# EAGLE board Mini AMplifier print (EAGLE 7.6.0), part 1 of 3
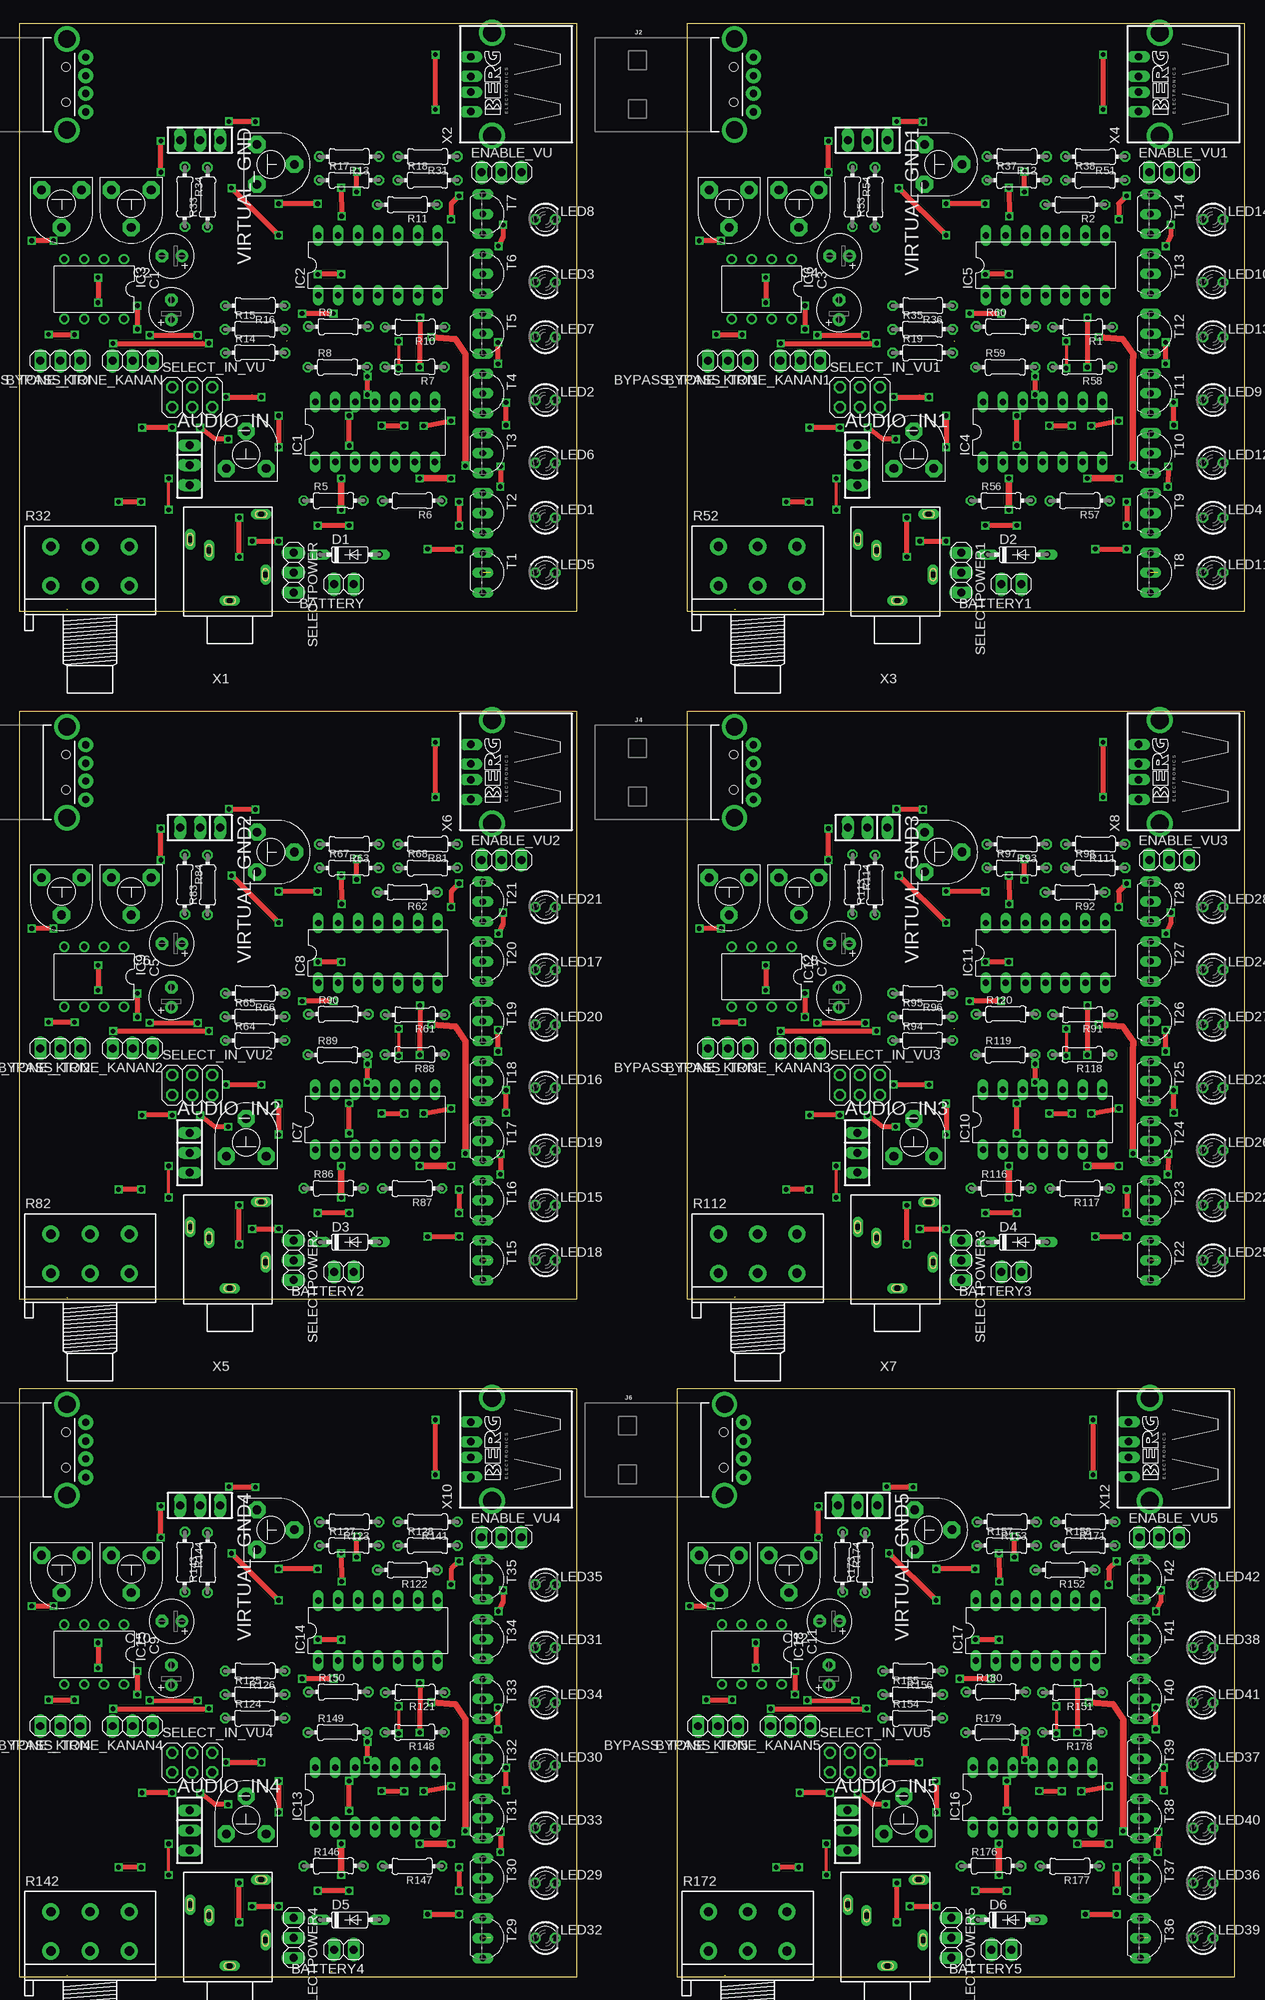
[diagram p0: board, top side]
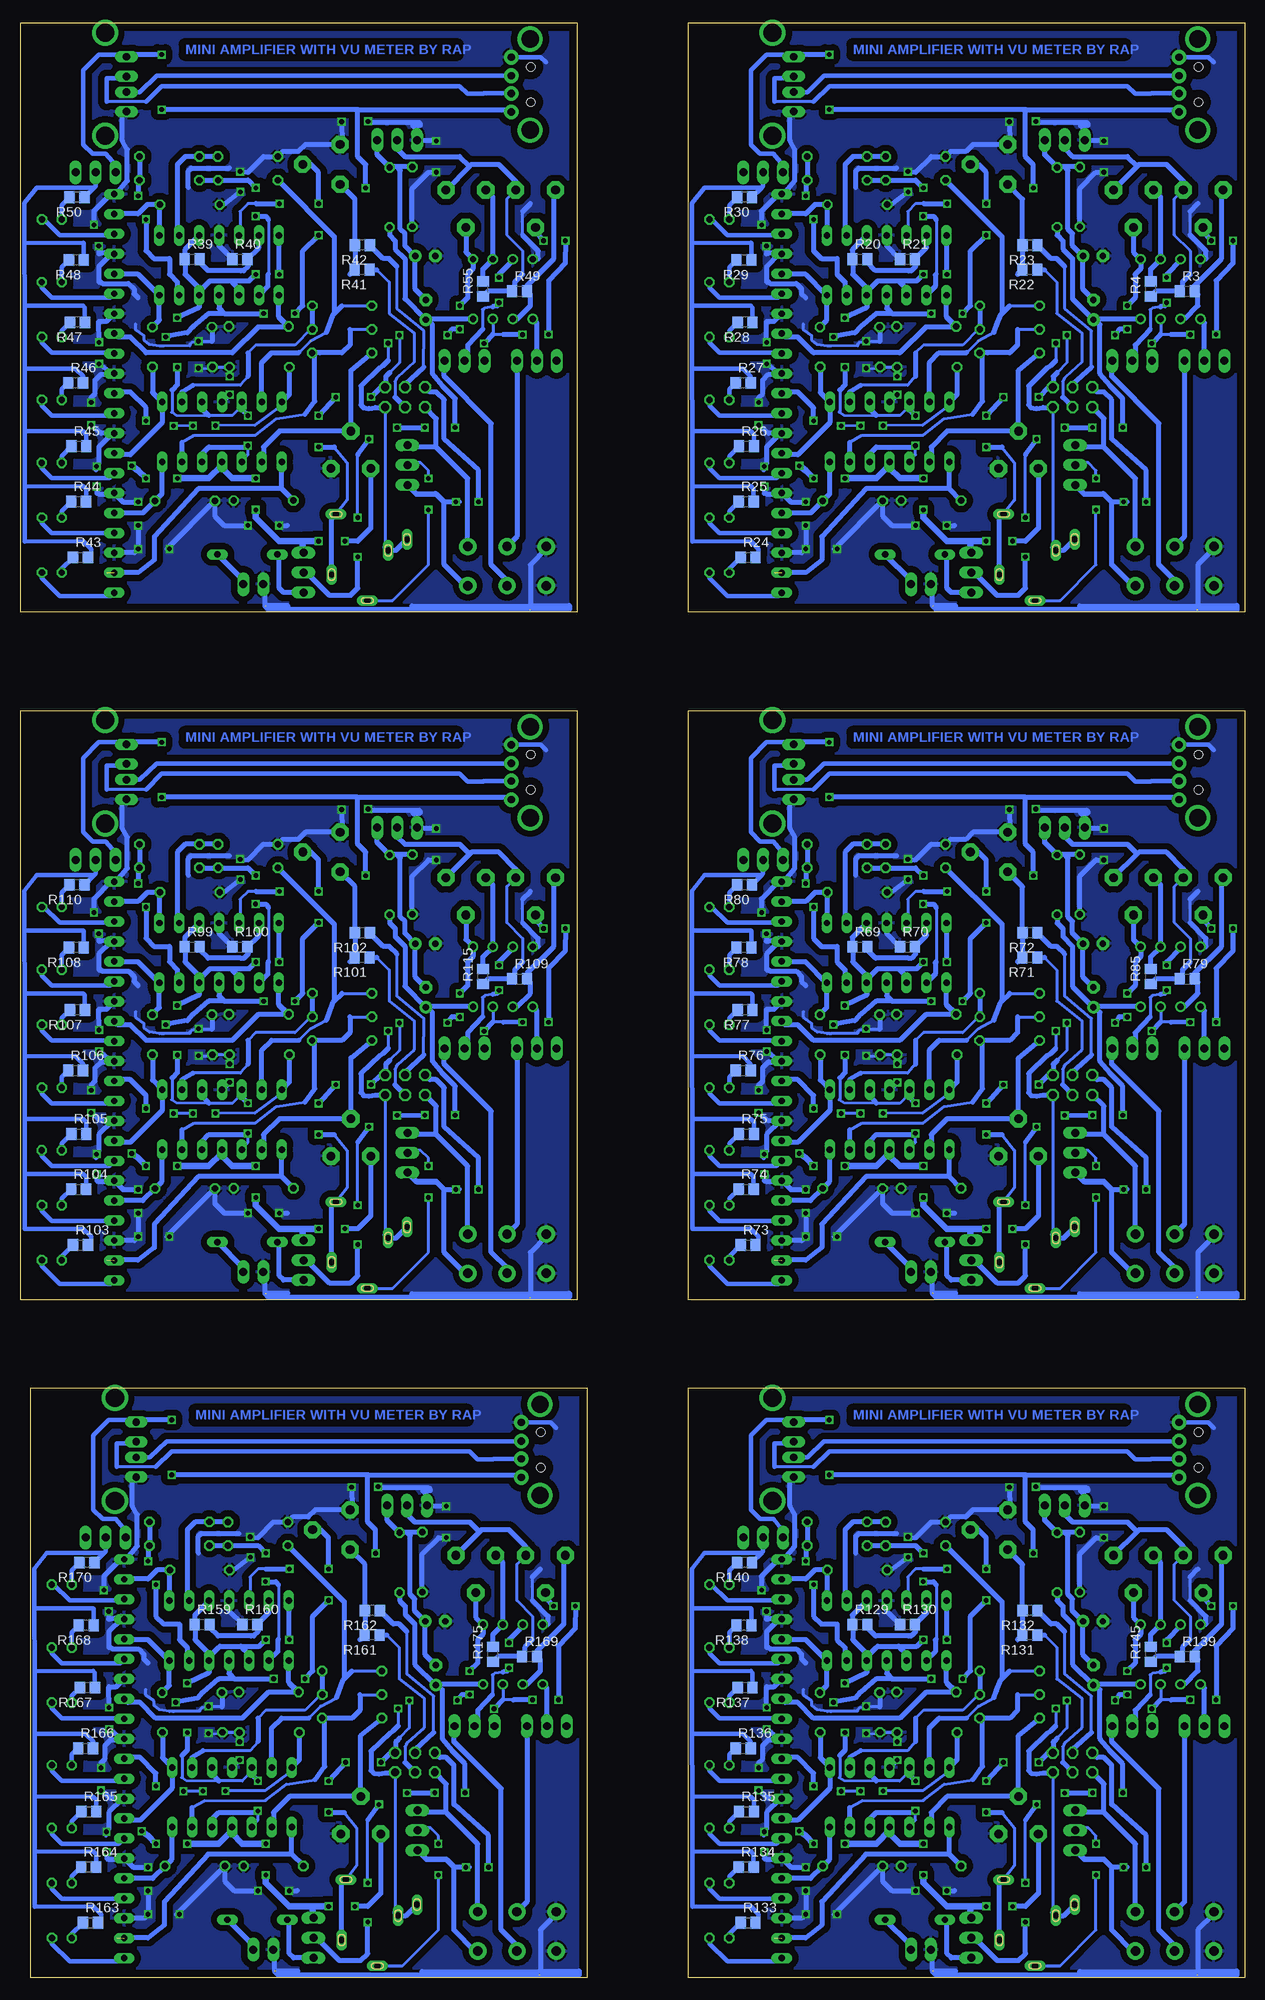
[diagram p1: board, bottom side, seen from below]

Size 156.09 x 248.99 mm. Coordinates in mm from the lower left corner, seen from the top.
Outline: 0,173.99 0,248.99 71,248.99 71,173.99 0,173.99
Outline: 85.09,173.99 85.09,248.99 156.09,248.99 156.09,173.99 85.09,173.99
Outline: 0,86.36 0,161.36 71,161.36 71,86.36 0,86.36
Outline: 85.09,86.36 85.09,161.36 156.09,161.36 156.09,86.36 85.09,86.36
Outline: 0,0 0,75 71,75 71,0 0,0
Outline: 83.82,0 83.82,75 154.82,75 154.82,0 83.82,0
Copper layers (1*16): Top 0.035mm / dielectric 1.5mm / Bottom 0.035mm
Design rules "default": minimum track width 10mil, minimum drill 24mil, track to track 8mil, track to pad 8mil, pad to pad 8mil, via to via 8mil, smd to smd 8mil, copper to edge 40mil, drill to drill 8mil, minimum pad ring 10mil, minimum via ring 8mil, stop-mask expansion 4mil, vias tented up to drill 0mil, thermal gap 10mil

## Footprints (pad centres in the part's own frame; a part is rotated, then mirrored left to right if it is on the bottom)
SIP-100-3V = drill 1.016 long: 1 -2.54,0; 2 0,0; 3 2.54,0
1X02 = drill 1.016 long: 1 -1.27,0; 2 1.27,0
1X03 = drill 1.016 long: 1 -2.54,0; 2 0,0; 3 2.54,0
E2,5-6 = drill 0.813 pad 1.6: + -1.27,0 | drill 0.813 pad 1.6 octagon: - 1.27,0
DO35-7 = drill 0.813 long: A 3.81,0; C -3.81,0
DIL14 = drill 0.813 long: 1 -7.62,-3.81; 2 -5.08,-3.81; 3 -2.54,-3.81; 4 0,-3.81; 5 2.54,-3.81; 6 5.08,-3.81; 7 7.62,-3.81; 8 7.62,3.81; 9 5.08,3.81; 10 2.54,3.81; 11 0,3.81; 12 -2.54,3.81; 13 -5.08,3.81; 14 -7.62,3.81
DIL08 = drill 0.813 pad 1.27: 1 -3.81,-3.81; 2 -1.27,-3.81; 3 1.27,-3.81; 4 3.81,-3.81; 5 3.81,3.81; 6 1.27,3.81; 7 -1.27,3.81; 8 -3.81,3.81
USB-A-H = drill 0.914 pad 1.88: D+ 2.4,1.127; D- 2.4,-1.127; GND 2.4,3.5; VBUS 2.4,-3.5 | drill 2.2: SHLD1 0,-5.8; SHLD2 0,5.8 | hole 1.1: -0.1,2.25; -0.1,-2.25
LED3MM = drill 0.813 octagon: A -1.27,0; K 1.27,0
0204/7 = drill 0.813 octagon: 1 -3.81,0; 2 3.81,0
R0805 = smd 1.3 x 1.5: 1 -0.95,0; 2 0.95,0
3RP/1610G = drill 1.2 pad 2.184: 1-1 -5,0; 1-2 0,0; 1-3 5,0; 2-1 -5,5; 2-2 0,5; 2-3 5,5
2X03 = drill 1.016 octagon: 1 -2.54,-1.27; 2 -2.54,1.27; 3 0,-1.27; 4 0,1.27; 5 2.54,-1.27; 6 2.54,1.27
TO92-EBC = drill 0.813 long: B 0,-1.27; C 2.54,-1.27; E -2.54,-1.27
TRIMPOT = drill 1.1 pad 2.184 octagon: 1 -2.538,1.271; 2 0,-3.5; 3 2.536,1.271
1503_09 = drill 0.8 pad 1.2 long: 1 0,-2.1; 2 -4.55,-5.4; 3 5.05,-9.9; 4 -4,-13.1; 5 2.65,-8.5
PN87520-S = drill 0.95 long: 1 -3.5,2.71; 2 -1,2.71; 3 1,2.71; 4 3.5,2.71 | drill 2.3 pad 2.9: S1 -6.57,0; S2 6.57,0

## Placement (x,y rotation side)
AUDIO_IN  [SIP-100-3V]  21.66,192.68 270 top
AUDIO_IN1  [SIP-100-3V]  106.75,192.68 270 top
AUDIO_IN2  [SIP-100-3V]  21.66,105.05 270 top
AUDIO_IN3  [SIP-100-3V]  106.75,105.05 270 top
AUDIO_IN4  [SIP-100-3V]  21.66,18.69 270 top
AUDIO_IN5  [SIP-100-3V]  105.48,18.69 270 top
BATTERY  [1X02]  41.33,177.49 180 top
BATTERY1  [1X02]  126.42,177.49 180 top
BATTERY2  [1X02]  41.33,89.86 180 top
BATTERY3  [1X02]  126.42,89.86 180 top
BATTERY4  [1X02]  41.33,3.5 180 top
BATTERY5  [1X02]  125.15,3.5 180 top
BYPASS_TONE_KANAN  [1X03]  14.4,205.98 180 top
BYPASS_TONE_KANAN1  [1X03]  99.49,205.98 180 top
BYPASS_TONE_KANAN2  [1X03]  14.4,118.35 180 top
BYPASS_TONE_KANAN3  [1X03]  99.49,118.35 180 top
BYPASS_TONE_KANAN4  [1X03]  14.4,31.99 180 top
BYPASS_TONE_KANAN5  [1X03]  98.22,31.99 180 top
BYPASS_TONE_KIRI  [1X03]  5.18,205.98 180 top
BYPASS_TONE_KIRI1  [1X03]  90.27,205.98 180 top
BYPASS_TONE_KIRI2  [1X03]  5.18,118.35 180 top
BYPASS_TONE_KIRI3  [1X03]  90.27,118.35 180 top
BYPASS_TONE_KIRI4  [1X03]  5.18,31.99 180 top
BYPASS_TONE_KIRI5  [1X03]  89,31.99 180 top
C1  [E2,5-6]  19.34,212.48 90 top
C2  [E2,5-6]  19.4,219.33 180 top
C3  [E2,5-6]  104.43,212.48 90 top
C4  [E2,5-6]  104.49,219.33 180 top
C5  [E2,5-6]  19.34,124.85 90 top
C6  [E2,5-6]  19.4,131.7 180 top
C7  [E2,5-6]  104.43,124.85 90 top
C8  [E2,5-6]  104.49,131.7 180 top
C9  [E2,5-6]  19.34,38.49 90 top
C10  [E2,5-6]  19.4,45.34 180 top
C11  [E2,5-6]  103.16,38.49 90 top
C12  [E2,5-6]  103.22,45.34 180 top
D1  1N4148DO35-7  [DO35-7]  42.07,181.3 0 top
D2  1N4148DO35-7  [DO35-7]  127.16,181.3 0 top
D3  1N4148DO35-7  [DO35-7]  42.07,93.67 0 top
D4  1N4148DO35-7  [DO35-7]  127.16,93.67 0 top
D5  1N4148DO35-7  [DO35-7]  42.07,7.31 0 top
D6  1N4148DO35-7  [DO35-7]  125.89,7.31 0 top
ENABLE_VU  [1X03]  61.42,230 0 top
ENABLE_VU1  [1X03]  146.51,230 0 top
ENABLE_VU2  [1X03]  61.42,142.37 0 top
ENABLE_VU3  [1X03]  146.51,142.37 0 top
ENABLE_VU4  [1X03]  61.42,56.01 0 top
ENABLE_VU5  [1X03]  145.24,56.01 0 top
IC1  LM324N  [DIL14]  45.31,196.9 0 top
IC2  LM324N  [DIL14]  45.68,218.14 0 top
IC3  LM358N  [DIL08]  9.5,215.11 180 top
IC4  LM324N  [DIL14]  130.4,196.9 0 top
IC5  LM324N  [DIL14]  130.77,218.14 0 top
IC6  LM358N  [DIL08]  94.59,215.11 180 top
IC7  LM324N  [DIL14]  45.31,109.27 0 top
IC8  LM324N  [DIL14]  45.68,130.51 0 top
IC9  LM358N  [DIL08]  9.5,127.48 180 top
IC10  LM324N  [DIL14]  130.4,109.27 0 top
IC11  LM324N  [DIL14]  130.77,130.51 0 top
IC12  LM358N  [DIL08]  94.59,127.48 180 top
IC13  LM324N  [DIL14]  45.31,22.91 0 top
IC14  LM324N  [DIL14]  45.68,44.15 0 top
IC15  LM358N  [DIL08]  9.5,41.12 180 top
IC16  LM324N  [DIL14]  129.13,22.91 0 top
IC17  LM324N  [DIL14]  129.5,44.15 0 top
IC18  LM358N  [DIL08]  93.32,41.12 180 top
J1  USB_A_PTH_MALE  [USB-A-H]  6.03,241.17 0 top
J2  USB_A_PTH_MALE  [USB-A-H]  91.12,241.17 0 top
J3  USB_A_PTH_MALE  [USB-A-H]  6.03,153.54 0 top
J4  USB_A_PTH_MALE  [USB-A-H]  91.12,153.54 0 top
J5  USB_A_PTH_MALE  [USB-A-H]  6.03,67.18 0 top
J6  USB_A_PTH_MALE  [USB-A-H]  89.85,67.18 0 top
LED1  [LED3MM]  67,185.99 0 top
LED2  [LED3MM]  67,200.99 0 top
LED3  [LED3MM]  67.01,215.98 0 top
LED4  [LED3MM]  152.09,185.99 0 top
LED5  [LED3MM]  67,178.98 0 top
LED6  [LED3MM]  67,192.98 0 top
LED7  [LED3MM]  67,208.99 0 top
LED8  [LED3MM]  67,223.99 0 top
LED9  [LED3MM]  152.09,200.99 0 top
LED10  [LED3MM]  152.1,215.98 0 top
LED11  [LED3MM]  152.09,178.98 0 top
LED12  [LED3MM]  152.09,192.98 0 top
LED13  [LED3MM]  152.09,208.99 0 top
LED14  [LED3MM]  152.09,223.99 0 top
LED15  [LED3MM]  67,98.36 0 top
LED16  [LED3MM]  67,113.36 0 top
LED17  [LED3MM]  67.01,128.35 0 top
LED18  [LED3MM]  67,91.35 0 top
LED19  [LED3MM]  67,105.35 0 top
LED20  [LED3MM]  67,121.36 0 top
LED21  [LED3MM]  67,136.36 0 top
LED22  [LED3MM]  152.09,98.36 0 top
LED23  [LED3MM]  152.09,113.36 0 top
LED24  [LED3MM]  152.1,128.35 0 top
LED25  [LED3MM]  152.09,91.35 0 top
LED26  [LED3MM]  152.09,105.35 0 top
LED27  [LED3MM]  152.09,121.36 0 top
LED28  [LED3MM]  152.09,136.36 0 top
LED29  [LED3MM]  67,12 0 top
LED30  [LED3MM]  67,27 0 top
LED31  [LED3MM]  67.01,41.99 0 top
LED32  [LED3MM]  67,4.99 0 top
LED33  [LED3MM]  67,18.99 0 top
LED34  [LED3MM]  67,35 0 top
LED35  [LED3MM]  67,50 0 top
LED36  [LED3MM]  150.82,12 0 top
LED37  [LED3MM]  150.82,27 0 top
LED38  [LED3MM]  150.83,41.99 0 top
LED39  [LED3MM]  150.82,4.99 0 top
LED40  [LED3MM]  150.82,18.99 0 top
LED41  [LED3MM]  150.82,35 0 top
LED42  [LED3MM]  150.82,50 0 top
R1  [0204/7]  135.48,210.26 180 top
R2  [0204/7]  134.51,225.87 180 top
R3  [R0805]  7.37,214.84 0 bottom
R4  [R0805]  12.03,215.13 90 bottom
R5  [0204/7]  40.01,188.16 0 top
R6  [0204/7]  50.03,188.13 180 top
R7  [0204/7]  50.35,205.19 180 top
R8  [0204/7]  40.53,205.16 0 top
R9  [0204/7]  40.62,210.33 0 top
R10  [0204/7]  50.39,210.26 180 top
R11  [0204/7]  49.42,225.87 180 top
R12  [0204/7]  127.09,231.99 180 top
R13  [0204/7]  42,231.99 180 top
R14  [0204/7]  30,206.99 0 top
R15  [0204/7]  30,209.99 0 top
R16  [0204/7]  30,212.99 180 top
R17  [0204/7]  41.99,228.99 0 top
R18  [0204/7]  52,228.99 0 top
R19  [0204/7]  115.09,206.99 0 top
R20  10k  [R0805]  49.1,218.92 0 bottom
R21  <=1k  [R0805]  43.02,218.92 0 bottom
R22  10k  [R0805]  27.45,217.57 180 bottom
R23  10k  [R0805]  27.42,220.7 180 bottom
R24  1k  [R0805]  63.34,180.92 0 bottom
R25  [R0805]  63.58,188.03 0 bottom
R26  [R0805]  63.55,195.08 0 bottom
R27  [R0805]  63.97,203.16 0 bottom
R28  [R0805]  63.73,210.87 180 bottom
R29  [R0805]  63.87,218.82 180 bottom
R30  [R0805]  63.79,226.82 180 bottom
R31  [0204/7]  52,232 180 top
R32  [3RP/1610G]  8.98,177.31 0 top
R33  [0204/7]  23.94,226.81 90 top
R34  [0204/7]  21.06,226.87 270 top
R35  [0204/7]  115.09,209.99 0 top
R36  [0204/7]  115.09,212.99 180 top
R37  [0204/7]  127.08,228.99 0 top
R38  [0204/7]  137.09,228.99 0 top
R39  10k  [R0805]  134.19,218.92 0 bottom
R40  <=1k  [R0805]  128.11,218.92 0 bottom
R41  10k  [R0805]  112.54,217.57 180 bottom
R42  10k  [R0805]  112.51,220.7 180 bottom
R43  1k  [R0805]  148.43,180.92 0 bottom
R44  [R0805]  148.67,188.03 0 bottom
R45  [R0805]  148.64,195.08 0 bottom
R46  [R0805]  149.06,203.16 0 bottom
R47  [R0805]  148.82,210.87 180 bottom
R48  [R0805]  148.96,218.82 180 bottom
R49  [R0805]  92.46,214.84 0 bottom
R50  [R0805]  148.88,226.82 180 bottom
R51  [0204/7]  137.09,232 180 top
R52  [3RP/1610G]  94.07,177.31 0 top
R53  [0204/7]  109.03,226.81 90 top
R54  [0204/7]  106.15,226.87 270 top
R55  [R0805]  97.12,215.13 90 bottom
R56  [0204/7]  125.1,188.16 0 top
R57  [0204/7]  135.12,188.13 180 top
R58  [0204/7]  135.44,205.19 180 top
R59  [0204/7]  125.62,205.16 0 top
R60  [0204/7]  125.71,210.33 0 top
R61  [0204/7]  50.39,122.63 180 top
R62  [0204/7]  49.42,138.24 180 top
R63  [0204/7]  42,144.36 180 top
R64  [0204/7]  30,119.36 0 top
R65  [0204/7]  30,122.36 0 top
R66  [0204/7]  30,125.36 180 top
R67  [0204/7]  41.99,141.36 0 top
R68  [0204/7]  52,141.36 0 top
R69  10k  [R0805]  49.1,131.29 0 bottom
R70  <=1k  [R0805]  43.02,131.29 0 bottom
R71  10k  [R0805]  27.45,129.94 180 bottom
R72  10k  [R0805]  27.42,133.07 180 bottom
R73  1k  [R0805]  63.34,93.29 0 bottom
R74  [R0805]  63.58,100.4 0 bottom
R75  [R0805]  63.55,107.45 0 bottom
R76  [R0805]  63.97,115.53 0 bottom
R77  [R0805]  63.73,123.24 180 bottom
R78  [R0805]  63.87,131.19 180 bottom
R79  [R0805]  7.37,127.21 0 bottom
R80  [R0805]  63.79,139.19 180 bottom
R81  [0204/7]  52,144.37 180 top
R82  [3RP/1610G]  8.98,89.68 0 top
R83  [0204/7]  23.94,139.18 90 top
R84  [0204/7]  21.06,139.24 270 top
R85  [R0805]  12.03,127.5 90 bottom
R86  [0204/7]  40.01,100.53 0 top
R87  [0204/7]  50.03,100.5 180 top
R88  [0204/7]  50.35,117.56 180 top
R89  [0204/7]  40.53,117.53 0 top
R90  [0204/7]  40.62,122.7 0 top
R91  [0204/7]  135.48,122.63 180 top
R92  [0204/7]  134.51,138.24 180 top
R93  [0204/7]  127.09,144.36 180 top
R94  [0204/7]  115.09,119.36 0 top
R95  [0204/7]  115.09,122.36 0 top
R96  [0204/7]  115.09,125.36 180 top
R97  [0204/7]  127.08,141.36 0 top
R98  [0204/7]  137.09,141.36 0 top
R99  10k  [R0805]  134.19,131.29 0 bottom
R100  <=1k  [R0805]  128.11,131.29 0 bottom
R101  10k  [R0805]  112.54,129.94 180 bottom
R102  10k  [R0805]  112.51,133.07 180 bottom
R103  1k  [R0805]  148.43,93.29 0 bottom
R104  [R0805]  148.67,100.4 0 bottom
R105  [R0805]  148.64,107.45 0 bottom
R106  [R0805]  149.06,115.53 0 bottom
R107  [R0805]  148.82,123.24 180 bottom
R108  [R0805]  148.96,131.19 180 bottom
R109  [R0805]  92.46,127.21 0 bottom
R110  [R0805]  148.88,139.19 180 bottom
R111  [0204/7]  137.09,144.37 180 top
R112  [3RP/1610G]  94.07,89.68 0 top
R113  [0204/7]  109.03,139.18 90 top
R114  [0204/7]  106.15,139.24 270 top
R115  [R0805]  97.12,127.5 90 bottom
R116  [0204/7]  125.1,100.53 0 top
R117  [0204/7]  135.12,100.5 180 top
R118  [0204/7]  135.44,117.56 180 top
R119  [0204/7]  125.62,117.53 0 top
R120  [0204/7]  125.71,122.7 0 top
R121  [0204/7]  50.39,36.27 180 top
R122  [0204/7]  49.42,51.88 180 top
R123  [0204/7]  42,58 180 top
R124  [0204/7]  30,33 0 top
R125  [0204/7]  30,36 0 top
R126  [0204/7]  30,39 180 top
R127  [0204/7]  41.99,55 0 top
R128  [0204/7]  52,55 0 top
R129  10k  [R0805]  49.1,44.93 0 bottom
R130  <=1k  [R0805]  43.02,44.93 0 bottom
R131  10k  [R0805]  27.45,43.58 180 bottom
R132  10k  [R0805]  27.42,46.71 180 bottom
R133  1k  [R0805]  63.34,6.93 0 bottom
R134  [R0805]  63.58,14.04 0 bottom
R135  [R0805]  63.55,21.09 0 bottom
R136  [R0805]  63.97,29.17 0 bottom
R137  [R0805]  63.73,36.88 180 bottom
R138  [R0805]  63.87,44.83 180 bottom
R139  [R0805]  7.37,40.85 0 bottom
R140  [R0805]  63.79,52.83 180 bottom
R141  [0204/7]  52,58.01 180 top
R142  [3RP/1610G]  8.98,3.32 0 top
R143  [0204/7]  23.94,52.82 90 top
R144  [0204/7]  21.06,52.88 270 top
R145  [R0805]  12.03,41.14 90 bottom
R146  [0204/7]  40.01,14.17 0 top
R147  [0204/7]  50.03,14.14 180 top
R148  [0204/7]  50.35,31.2 180 top
R149  [0204/7]  40.53,31.17 0 top
R150  [0204/7]  40.62,36.34 0 top
R151  [0204/7]  134.21,36.27 180 top
R152  [0204/7]  133.24,51.88 180 top
R153  [0204/7]  125.82,58 180 top
R154  [0204/7]  113.82,33 0 top
R155  [0204/7]  113.82,36 0 top
R156  [0204/7]  113.82,39 180 top
R157  [0204/7]  125.81,55 0 top
R158  [0204/7]  135.82,55 0 top
R159  10k  [R0805]  132.92,44.93 0 bottom
R160  <=1k  [R0805]  126.84,44.93 0 bottom
R161  10k  [R0805]  111.27,43.58 180 bottom
R162  10k  [R0805]  111.24,46.71 180 bottom
R163  1k  [R0805]  147.16,6.93 0 bottom
R164  [R0805]  147.4,14.04 0 bottom
R165  [R0805]  147.37,21.09 0 bottom
R166  [R0805]  147.79,29.17 0 bottom
R167  [R0805]  147.55,36.88 180 bottom
R168  [R0805]  147.69,44.83 180 bottom
R169  [R0805]  91.19,40.85 0 bottom
R170  [R0805]  147.61,52.83 180 bottom
R171  [0204/7]  135.82,58.01 180 top
R172  [3RP/1610G]  92.8,3.32 0 top
R173  [0204/7]  107.76,52.82 90 top
R174  [0204/7]  104.88,52.88 270 top
R175  [R0805]  95.85,41.14 90 bottom
R176  [0204/7]  123.83,14.17 0 top
R177  [0204/7]  133.85,14.14 180 top
R178  [0204/7]  134.17,31.2 180 top
R179  [0204/7]  124.35,31.17 0 top
R180  [0204/7]  124.44,36.34 0 top
SELECT_IN_VU  [2X03]  21.99,201.33 0 top
SELECT_IN_VU1  [2X03]  107.08,201.33 0 top
SELECT_IN_VU2  [2X03]  21.99,113.7 0 top
SELECT_IN_VU3  [2X03]  107.08,113.7 0 top
SELECT_IN_VU4  [2X03]  21.99,27.34 0 top
SELECT_IN_VU5  [2X03]  105.81,27.34 0 top
SELECTPOWER  [1X03]  34.91,178.98 270 top
SELECTPOWER1  [1X03]  120,178.98 270 top
SELECTPOWER2  [1X03]  34.91,91.35 270 top
SELECTPOWER3  [1X03]  120,91.35 270 top
SELECTPOWER4  [1X03]  34.91,4.99 270 top
SELECTPOWER5  [1X03]  118.73,4.99 270 top
T1  [TO92-EBC]  60.31,178.96 270 top
T2  [TO92-EBC]  60.31,186.58 270 top
T3  [TO92-EBC]  60.31,194.2 270 top
T4  [TO92-EBC]  60.31,201.82 270 top
T5  [TO92-EBC]  60.31,209.44 270 top
T6  [TO92-EBC]  60.31,217.06 270 top
T7  [TO92-EBC]  60.31,224.68 270 top
T8  [TO92-EBC]  145.4,178.96 270 top
T9  [TO92-EBC]  145.4,186.58 270 top
T10  [TO92-EBC]  145.4,194.2 270 top
T11  [TO92-EBC]  145.4,201.82 270 top
T12  [TO92-EBC]  145.4,209.44 270 top
T13  [TO92-EBC]  145.4,217.06 270 top
T14  [TO92-EBC]  145.4,224.68 270 top
T15  [TO92-EBC]  60.31,91.33 270 top
T16  [TO92-EBC]  60.31,98.95 270 top
T17  [TO92-EBC]  60.31,106.57 270 top
T18  [TO92-EBC]  60.31,114.19 270 top
T19  [TO92-EBC]  60.31,121.81 270 top
T20  [TO92-EBC]  60.31,129.43 270 top
T21  [TO92-EBC]  60.31,137.05 270 top
T22  [TO92-EBC]  145.4,91.33 270 top
T23  [TO92-EBC]  145.4,98.95 270 top
T24  [TO92-EBC]  145.4,106.57 270 top
T25  [TO92-EBC]  145.4,114.19 270 top
T26  [TO92-EBC]  145.4,121.81 270 top
T27  [TO92-EBC]  145.4,129.43 270 top
T28  [TO92-EBC]  145.4,137.05 270 top
T29  [TO92-EBC]  60.31,4.97 270 top
T30  [TO92-EBC]  60.31,12.59 270 top
T31  [TO92-EBC]  60.31,20.21 270 top
T32  [TO92-EBC]  60.31,27.83 270 top
T33  [TO92-EBC]  60.31,35.45 270 top
T34  [TO92-EBC]  60.31,43.07 270 top
T35  [TO92-EBC]  60.31,50.69 270 top
T36  [TO92-EBC]  144.13,4.97 270 top
T37  [TO92-EBC]  144.13,12.59 270 top
T38  [TO92-EBC]  144.13,20.21 270 top
T39  [TO92-EBC]  144.13,27.83 270 top
T40  [TO92-EBC]  144.13,35.45 270 top
T41  [TO92-EBC]  144.13,43.07 270 top
T42  [TO92-EBC]  144.13,50.69 270 top
U$1  TRIMPOT  [TRIMPOT]  31.52,231 90 top
U$2  TRIMPOT  [TRIMPOT]  28.88,193.51 180 top
U$3  TRIMPOT  [TRIMPOT]  14.23,226.47 0 top
U$4  TRIMPOT  [TRIMPOT]  5.34,226.47 0 top
U$5  TRIMPOT  [TRIMPOT]  116.61,231 90 top
U$6  TRIMPOT  [TRIMPOT]  113.97,193.51 180 top
U$7  TRIMPOT  [TRIMPOT]  99.32,226.47 0 top
U$8  TRIMPOT  [TRIMPOT]  90.43,226.47 0 top
U$9  TRIMPOT  [TRIMPOT]  31.52,143.37 90 top
U$10  TRIMPOT  [TRIMPOT]  28.88,105.88 180 top
U$11  TRIMPOT  [TRIMPOT]  14.23,138.84 0 top
U$12  TRIMPOT  [TRIMPOT]  5.34,138.84 0 top
U$13  TRIMPOT  [TRIMPOT]  116.61,143.37 90 top
U$14  TRIMPOT  [TRIMPOT]  113.97,105.88 180 top
U$15  TRIMPOT  [TRIMPOT]  99.32,138.84 0 top
U$16  TRIMPOT  [TRIMPOT]  90.43,138.84 0 top
U$17  TRIMPOT  [TRIMPOT]  31.52,57.01 90 top
U$18  TRIMPOT  [TRIMPOT]  28.88,19.52 180 top
U$19  TRIMPOT  [TRIMPOT]  14.23,52.48 0 top
U$20  TRIMPOT  [TRIMPOT]  5.34,52.48 0 top
U$21  TRIMPOT  [TRIMPOT]  115.34,57.01 90 top
U$22  TRIMPOT  [TRIMPOT]  112.7,19.52 180 top
U$23  TRIMPOT  [TRIMPOT]  98.05,52.48 0 top
U$24  TRIMPOT  [TRIMPOT]  89.16,52.48 0 top
VIRTUAL_GND  [SIP-100-3V]  22.99,234.1 180 top
VIRTUAL_GND1  [SIP-100-3V]  108.08,234.1 180 top
VIRTUAL_GND2  [SIP-100-3V]  22.99,146.47 180 top
VIRTUAL_GND3  [SIP-100-3V]  108.08,146.47 180 top
VIRTUAL_GND4  [SIP-100-3V]  22.99,60.11 180 top
VIRTUAL_GND5  [SIP-100-3V]  106.81,60.11 180 top
X1  1503_09  [1503_09]  26.78,173.32 180 top
X2  PN87520-S  [PN87520-S]  60.22,241.22 90 top
X3  1503_09  [1503_09]  111.87,173.32 180 top
X4  PN87520-S  [PN87520-S]  145.31,241.22 90 top
X5  1503_09  [1503_09]  26.78,85.69 180 top
X6  PN87520-S  [PN87520-S]  60.22,153.59 90 top
X7  1503_09  [1503_09]  111.87,85.69 180 top
X8  PN87520-S  [PN87520-S]  145.31,153.59 90 top
X9  1503_09  [1503_09]  26.78,-0.67 180 top
X10  PN87520-S  [PN87520-S]  60.22,67.23 90 top
X11  1503_09  [1503_09]  110.6,-0.67 180 top
X12  PN87520-S  [PN87520-S]  144.04,67.23 90 top

## Library data of the parts
AUDIO_IN AUDIO_IN1-AUDIO_IN5 VIRTUAL_GND VIRTUAL_GND1-VIRTUAL_GND5 = con-hdrs40
BATTERY BATTERY1-BATTERY5 BYPASS_TONE_KANAN BYPASS_TONE_KANAN1-BYPASS_TONE_KANAN5 BYPASS_TONE_KIRI BYPASS_TONE_KIRI1-BYPASS_TONE_KIRI5 ENABLE_VU ENABLE_VU1-ENABLE_VU5 SELECT_IN_VU SELECT_IN_VU1-SELECT_IN_VU5 SELECTPOWER SELECTPOWER1-SELECTPOWER5 = pinhead
C1-C12 = rcl
D1-D6 = diode
IC1-IC18 = linear
J1-J6 = SparkFun-Connectors; PROD_ID: CONN-08367; SF_ID: PRT-00437
LED1-LED42 = led
R1-R31 R33-R51 R53-R81 R83-R111 R113-R141 R143-R171 R173-R180 = eagle-ltspice; SPICEMODEL: NONE; SPICEPREFIX: R
R32 R52 R82 R112 R142 R172 = pot
T1-T42 = transistor
U$1-U$24 = trimpot
X1 X3 X5 X7 X9 X11 = con-lumberg; OC_FARNELL: 1243244; OC_NEWARK: unknown
X2 X4 X6 X8 X10 X12 = con-berg; OC_FARNELL: unknown; OC_NEWARK: unknown

## Nets
AUDIO: IC1.3 IC1.5 IC1.10 IC1.12 IC2.3 IC2.5 IC2.10 IC2.14 R20.1
AUDIO1: IC4.3 IC4.5 IC4.10 IC4.12 IC5.3 IC5.5 IC5.10 IC5.14 R39.1
AUDIO2: IC7.3 IC7.5 IC7.10 IC7.12 IC8.3 IC8.5 IC8.10 IC8.14 R69.1
AUDIO3: IC10.3 IC10.5 IC10.10 IC10.12 IC11.3 IC11.5 IC11.10 IC11.14 R99.1
AUDIO4: IC13.3 IC13.5 IC13.10 IC13.12 IC14.3 IC14.5 IC14.10 IC14.14 R129.1
AUDIO5: IC16.3 IC16.5 IC16.10 IC16.12 IC17.3 IC17.5 IC17.10 IC17.14 R159.1
GND: BATTERY.2 C2.- IC1.11 IC2.11 IC3.4 J1.GND R5.2 R6.2 R7.2 R8.2 R9.2 R10.2 R11.2 R13.2 R21.1 R32.1-1 R32.2-1 R34.2 T1.E T2.E T3.E T4.E T5.E T6.E T7.E U$1.3 U$2.1 VIRTUAL_GND.3 X2.1
GND1: BATTERY1.2 C4.- IC4.11 IC5.11 IC6.4 J2.GND R1.2 R2.2 R12.2 R40.1 R52.1-1 R52.2-1 R54.2 R56.2 R57.2 R58.2 R59.2 R60.2 T8.E T9.E T10.E T11.E T12.E T13.E T14.E U$5.3 U$6.1 VIRTUAL_GND1.3 X4.1
GND2: BATTERY2.2 C6.- IC7.11 IC8.11 IC9.4 J3.GND R61.2 R62.2 R63.2 R70.1 R82.1-1 R82.2-1 R84.2 R86.2 R87.2 R88.2 R89.2 R90.2 T15.E T16.E T17.E T18.E T19.E T20.E T21.E U$9.3 U$10.1 VIRTUAL_GND2.3 X6.1
GND3: BATTERY3.2 C8.- IC10.11 IC11.11 IC12.4 J4.GND R91.2 R92.2 R93.2 R100.1 R112.1-1 R112.2-1 R114.2 R116.2 R117.2 R118.2 R119.2 R120.2 T22.E T23.E T24.E T25.E T26.E T27.E T28.E U$13.3 U$14.1 VIRTUAL_GND3.3 X8.1
GND4: BATTERY4.2 C10.- IC13.11 IC14.11 IC15.4 J5.GND R121.2 R122.2 R123.2 R130.1 R142.1-1 R142.2-1 R144.2 R146.2 R147.2 R148.2 R149.2 R150.2 T29.E T30.E T31.E T32.E T33.E T34.E T35.E U$17.3 U$18.1 VIRTUAL_GND4.3 X10.1
GND5: BATTERY5.2 C12.- IC16.11 IC17.11 IC18.4 J6.GND R151.2 R152.2 R153.2 R160.1 R172.1-1 R172.2-1 R174.2 R176.2 R177.2 R178.2 R179.2 R180.2 T36.E T37.E T38.E T39.E T40.E T41.E T42.E U$21.3 U$22.1 VIRTUAL_GND5.3 X12.1
GND_OP: R3.1 R4.1 U$3.3 U$4.3 VIRTUAL_GND.2
GND_OP1: R49.1 R55.1 U$7.3 U$8.3 VIRTUAL_GND1.2
GND_OP2: R79.1 R85.1 U$11.3 U$12.3 VIRTUAL_GND2.2
GND_OP3: R109.1 R115.1 U$15.3 U$16.3 VIRTUAL_GND3.2
GND_OP4: R139.1 R145.1 U$19.3 U$20.3 VIRTUAL_GND4.2
GND_OP5: R169.1 R175.1 U$23.3 U$24.3 VIRTUAL_GND5.2
IN_KANAN: AUDIO_IN.3 R32.1-3 SELECT_IN_VU.2
IN_KANAN1: AUDIO_IN1.3 R52.1-3 SELECT_IN_VU1.2
IN_KANAN2: AUDIO_IN2.3 R82.1-3 SELECT_IN_VU2.2
IN_KANAN3: AUDIO_IN3.3 R112.1-3 SELECT_IN_VU3.2
IN_KANAN4: AUDIO_IN4.3 R142.1-3 SELECT_IN_VU4.2
IN_KANAN5: AUDIO_IN5.3 R172.1-3 SELECT_IN_VU5.2
IN_KANAN_AMP: BYPASS_TONE_KANAN.2 IC3.3
IN_KANAN_AMP1: BYPASS_TONE_KANAN1.2 IC6.3
IN_KANAN_AMP2: BYPASS_TONE_KANAN2.2 IC9.3
IN_KANAN_AMP3: BYPASS_TONE_KANAN3.2 IC12.3
IN_KANAN_AMP4: BYPASS_TONE_KANAN4.2 IC15.3
IN_KANAN_AMP5: BYPASS_TONE_KANAN5.2 IC18.3
IN_KIRI: AUDIO_IN.1 R32.2-3 SELECT_IN_VU.1
IN_KIRI1: AUDIO_IN1.1 R52.2-3 SELECT_IN_VU1.1
IN_KIRI2: AUDIO_IN2.1 R82.2-3 SELECT_IN_VU2.1
IN_KIRI3: AUDIO_IN3.1 R112.2-3 SELECT_IN_VU3.1
IN_KIRI4: AUDIO_IN4.1 R142.2-3 SELECT_IN_VU4.1
IN_KIRI5: AUDIO_IN5.1 R172.2-3 SELECT_IN_VU5.1
IN_KIRI_AMP: BYPASS_TONE_KIRI.2 IC3.5
IN_KIRI_AMP1: BYPASS_TONE_KIRI1.2 IC6.5
IN_KIRI_AMP2: BYPASS_TONE_KIRI2.2 IC9.5
IN_KIRI_AMP3: BYPASS_TONE_KIRI3.2 IC12.5
IN_KIRI_AMP4: BYPASS_TONE_KIRI4.2 IC15.5
IN_KIRI_AMP5: BYPASS_TONE_KIRI5.2 IC18.5
IN_VU_LEFT: R22.1 SELECT_IN_VU.3
IN_VU_LEFT1: R41.1 SELECT_IN_VU1.3
IN_VU_LEFT2: R71.1 SELECT_IN_VU2.3
IN_VU_LEFT3: R101.1 SELECT_IN_VU3.3
IN_VU_LEFT4: R131.1 SELECT_IN_VU4.3
IN_VU_LEFT5: R161.1 SELECT_IN_VU5.3
IN_VU_RIGHT: R23.1 SELECT_IN_VU.4
IN_VU_RIGHT1: R42.1 SELECT_IN_VU1.4
IN_VU_RIGHT2: R72.1 SELECT_IN_VU2.4
IN_VU_RIGHT3: R102.1 SELECT_IN_VU3.4
IN_VU_RIGHT4: R132.1 SELECT_IN_VU4.4
IN_VU_RIGHT5: R162.1 SELECT_IN_VU5.4
LAMPU: ENABLE_VU.2 R24.2 R25.2 R26.2 R27.2 R28.1 R29.1 R30.1
LAMPU1: ENABLE_VU1.2 R43.2 R44.2 R45.2 R46.2 R47.1 R48.1 R50.1
LAMPU2: ENABLE_VU2.2 R73.2 R74.2 R75.2 R76.2 R77.1 R78.1 R80.1
LAMPU3: ENABLE_VU3.2 R103.2 R104.2 R105.2 R106.2 R107.1 R108.1 R110.1
LAMPU4: ENABLE_VU4.2 R133.2 R134.2 R135.2 R136.2 R137.1 R138.1 R140.1
LAMPU5: ENABLE_VU5.2 R163.2 R164.2 R165.2 R166.2 R167.1 R168.1 R170.1
N$1: AUDIO_IN.2 X1.1
N$2: LED5.K T1.C
N$3: IC3.6 R3.2 U$4.1
N$4: IC3.2 R4.2 U$3.1
N$5: LED1.K T2.C
N$6: IC2.12 U$1.2
N$7: LED6.K T3.C
N$8: LED2.K T4.C
N$9: IC2.13 R20.2 R21.2
N$10: LED7.A R28.2
N$11: LED3.K T6.C
N$12: LED7.K T5.C
N$13: LED8.K T7.C
N$14: R22.2 R23.2 U$1.1
N$15: LED3.A R29.2
N$16: LED8.A R30.2
N$17: LED6.A R26.1
N$18: LED2.A R27.1
N$19: LED5.A R24.1
N$20: LED1.A R25.1
N$21: BATTERY.1 D1.A
N$22: J1.D+ X2.2
N$23: J1.D- X2.3
N$24: C1.- C2.+ R33.2 R34.1 VIRTUAL_GND.1
N$25: IC6.6 R49.2 U$8.1
N$26: BYPASS_TONE_KANAN.1 R32.1-2
N$27: BYPASS_TONE_KIRI.1 R32.2-2
N$28: IC6.2 R55.2 U$7.1
N$29: LED11.K T8.C
N$30: LED4.K T9.C
N$31: LED12.K T10.C
N$32: LED9.K T11.C
N$33: LED10.K T13.C
N$34: LED13.K T12.C
N$35: LED14.K T14.C
N$36: IC5.12 U$5.2
N$37: IC5.13 R39.2 R40.2
N$38: R41.2 R42.2 U$5.1
N$39: AUDIO_IN1.2 X3.1
N$40: LED13.A R47.2
N$41: LED10.A R48.2
N$42: LED14.A R50.2
N$43: LED12.A R45.1
N$44: LED9.A R46.1
N$45: LED11.A R43.1
N$46: LED4.A R44.1
N$47: J2.D+ X4.2
N$48: J2.D- X4.3
N$49: BATTERY1.1 D2.A
N$50: C3.- C4.+ R53.2 R54.1 VIRTUAL_GND1.1
N$51: BYPASS_TONE_KANAN1.1 R52.1-2
N$52: BYPASS_TONE_KIRI1.1 R52.2-2
N$53: IC9.6 R79.2 U$12.1
N$54: IC9.2 R85.2 U$11.1
N$55: LED18.K T15.C
N$56: LED15.K T16.C
N$57: LED19.K T17.C
N$58: LED16.K T18.C
N$59: LED17.K T20.C
N$60: LED20.K T19.C
N$61: LED21.K T21.C
N$62: IC8.12 U$9.2
N$63: IC8.13 R69.2 R70.2
N$64: R71.2 R72.2 U$9.1
N$65: AUDIO_IN2.2 X5.1
N$66: LED20.A R77.2
N$67: LED17.A R78.2
N$68: LED21.A R80.2
N$69: LED19.A R75.1
N$70: LED16.A R76.1
N$71: LED18.A R73.1
N$72: LED15.A R74.1
N$73: J3.D+ X6.2
N$74: J3.D- X6.3
N$75: BATTERY2.1 D3.A
N$76: C5.- C6.+ R83.2 R84.1 VIRTUAL_GND2.1
N$77: BYPASS_TONE_KANAN2.1 R82.1-2
N$78: BYPASS_TONE_KIRI2.1 R82.2-2
N$79: IC12.6 R109.2 U$16.1
N$80: IC12.2 R115.2 U$15.1
N$81: LED25.K T22.C
N$82: LED22.K T23.C
N$83: LED26.K T24.C
N$84: LED23.K T25.C
N$85: LED24.K T27.C
N$86: LED27.K T26.C
N$87: LED28.K T28.C
N$88: IC11.12 U$13.2
N$89: IC11.13 R99.2 R100.2
N$90: R101.2 R102.2 U$13.1
N$91: AUDIO_IN3.2 X7.1
N$92: LED27.A R107.2
N$93: LED24.A R108.2
N$94: LED28.A R110.2
N$95: LED26.A R105.1
N$96: LED23.A R106.1
N$97: LED25.A R103.1
N$98: LED22.A R104.1
N$99: J4.D+ X8.2
N$100: J4.D- X8.3
N$101: BATTERY3.1 D4.A
N$102: C7.- C8.+ R113.2 R114.1 VIRTUAL_GND3.1
N$103: BYPASS_TONE_KANAN3.1 R112.1-2
N$104: BYPASS_TONE_KIRI3.1 R112.2-2
N$105: IC15.6 R139.2 U$20.1
N$106: IC15.2 R145.2 U$19.1
N$107: LED32.K T29.C
N$108: LED29.K T30.C
N$109: LED33.K T31.C
N$110: LED30.K T32.C
N$111: LED31.K T34.C
N$112: LED34.K T33.C
N$113: LED35.K T35.C
N$114: IC14.12 U$17.2
N$115: IC14.13 R129.2 R130.2
N$116: R131.2 R132.2 U$17.1
N$117: AUDIO_IN4.2 X9.1
N$118: LED34.A R137.2
N$119: LED31.A R138.2
N$120: LED35.A R140.2
N$121: LED33.A R135.1
N$122: LED30.A R136.1
N$123: LED32.A R133.1
N$124: LED29.A R134.1
N$125: J5.D+ X10.2
N$126: J5.D- X10.3
N$127: BATTERY4.1 D5.A
N$128: C9.- C10.+ R143.2 R144.1 VIRTUAL_GND4.1
N$129: BYPASS_TONE_KANAN4.1 R142.1-2
N$130: BYPASS_TONE_KIRI4.1 R142.2-2
N$131: IC18.6 R169.2 U$24.1
N$132: IC18.2 R175.2 U$23.1
N$133: LED39.K T36.C
N$134: LED36.K T37.C
N$135: LED40.K T38.C
N$136: LED37.K T39.C
N$137: LED38.K T41.C
N$138: LED41.K T40.C
N$139: LED42.K T42.C
N$140: IC17.12 U$21.2
N$141: IC17.13 R159.2 R160.2
N$142: R161.2 R162.2 U$21.1
N$143: AUDIO_IN5.2 X11.1
N$144: LED41.A R167.2
N$145: LED38.A R168.2
N$146: LED42.A R170.2
N$147: LED40.A R165.1
N$148: LED37.A R166.1
N$149: LED39.A R163.1
N$150: LED36.A R164.1
N$151: J6.D+ X12.2
N$152: J6.D- X12.3
N$153: BATTERY5.1 D6.A
N$154: C11.- C12.+ R173.2 R174.1 VIRTUAL_GND5.1
N$155: BYPASS_TONE_KANAN5.1 R172.1-2
N$156: BYPASS_TONE_KIRI5.1 R172.2-2
OUT1: IC1.1 R5.1 T1.B
OUT2: IC1.7 R6.1 T2.B
OUT3: IC1.8 R7.1 T3.B
OUT4: IC1.14 R8.1 T4.B
OUT5: IC2.1 R9.1 T5.B
OUT6: IC2.7 R10.1 T6.B
OUT7: IC2.8 R11.1 T7.B
OUT8: IC4.1 R56.1 T8.B
OUT9: IC4.7 R57.1 T9.B
OUT10: IC4.8 R58.1 T10.B
OUT11: IC4.14 R59.1 T11.B
OUT12: IC5.8 R2.1 T14.B
OUT13: IC5.7 R1.1 T13.B
OUT14: IC5.1 R60.1 T12.B
OUT15: IC7.1 R86.1 T15.B
OUT16: IC7.7 R87.1 T16.B
OUT17: IC7.8 R88.1 T17.B
OUT18: IC7.14 R89.1 T18.B
OUT19: IC8.8 R62.1 T21.B
OUT20: IC8.7 R61.1 T20.B
OUT21: IC8.1 R90.1 T19.B
OUT22: IC10.1 R116.1 T22.B
OUT23: IC10.7 R117.1 T23.B
OUT24: IC10.8 R118.1 T24.B
OUT25: IC10.14 R119.1 T25.B
OUT26: IC11.8 R92.1 T28.B
OUT27: IC11.7 R91.1 T27.B
OUT28: IC11.1 R120.1 T26.B
OUT29: IC13.1 R146.1 T29.B
OUT30: IC13.7 R147.1 T30.B
OUT31: IC13.8 R148.1 T31.B
OUT32: IC13.14 R149.1 T32.B
OUT33: IC14.8 R122.1 T35.B
OUT34: IC14.7 R121.1 T34.B
OUT35: IC14.1 R150.1 T33.B
OUT36: IC16.1 R176.1 T36.B
OUT37: IC16.7 R177.1 T37.B
OUT38: IC16.8 R178.1 T38.B
OUT39: IC16.14 R179.1 T39.B
OUT40: IC17.8 R152.1 T42.B
OUT41: IC17.7 R151.1 T41.B
OUT42: IC17.1 R180.1 T40.B
OUT_KANAN: IC3.1 SELECT_IN_VU.6 U$3.2 X1.2 X1.4
OUT_KANAN1: IC6.1 SELECT_IN_VU1.6 U$7.2 X3.2 X3.4
OUT_KANAN2: IC9.1 SELECT_IN_VU2.6 U$11.2 X5.2 X5.4
OUT_KANAN3: IC12.1 SELECT_IN_VU3.6 U$15.2 X7.2 X7.4
OUT_KANAN4: IC15.1 SELECT_IN_VU4.6 U$19.2 X9.2 X9.4
OUT_KANAN5: IC18.1 SELECT_IN_VU5.6 U$23.2 X11.2 X11.4
OUT_KIRI: IC3.7 SELECT_IN_VU.5 U$4.2 X1.3 X1.5
OUT_KIRI1: IC6.7 SELECT_IN_VU1.5 U$8.2 X3.3 X3.5
OUT_KIRI2: IC9.7 SELECT_IN_VU2.5 U$12.2 X5.3 X5.5
OUT_KIRI3: IC12.7 SELECT_IN_VU3.5 U$16.2 X7.3 X7.5
OUT_KIRI4: IC15.7 SELECT_IN_VU4.5 U$20.2 X9.3 X9.5
OUT_KIRI5: IC18.7 SELECT_IN_VU5.5 U$24.2 X11.3 X11.5
POWER: D1.C SELECTPOWER.3
POWER1: D2.C SELECTPOWER1.3
POWER2: D3.C SELECTPOWER2.3
POWER3: D4.C SELECTPOWER3.3
POWER4: D5.C SELECTPOWER4.3
POWER5: D6.C SELECTPOWER5.3
POWER_AMP: C1.+ IC3.8 R33.1 SELECTPOWER.2
POWER_AMP1: C3.+ IC6.8 R53.1 SELECTPOWER1.2
POWER_AMP2: C5.+ IC9.8 R83.1 SELECTPOWER2.2
POWER_AMP3: C7.+ IC12.8 R113.1 SELECTPOWER3.2
POWER_AMP4: C9.+ IC15.8 R143.1 SELECTPOWER4.2
POWER_AMP5: C11.+ IC18.8 R173.1 SELECTPOWER5.2
REF1: IC1.2 R14.1 U$2.2
REF2: IC1.6 R14.2 R15.1
REF3: IC1.9 R15.2 R16.1
REF4: IC1.13 R16.2 R17.1
REF5: IC2.2 R17.2 R18.1
REF6: IC2.6 R18.2 R31.1
REF7: IC2.9 R13.1 R31.2
REF8: IC4.2 R19.1 U$6.2
REF9: IC4.6 R19.2 R35.1
REF10: IC4.9 R35.2 R36.1
REF11: IC5.2 R37.2 R38.1
REF12: IC4.13 R36.2 R37.1
REF13: IC5.6 R38.2 R51.1
REF14: IC5.9 R12.1 R51.2
REF15: IC7.2 R64.1 U$10.2
REF16: IC7.6 R64.2 R65.1
REF17: IC7.9 R65.2 R66.1
REF18: IC8.2 R67.2 R68.1
REF19: IC7.13 R66.2 R67.1
REF20: IC8.6 R68.2 R81.1
REF21: IC8.9 R63.1 R81.2
REF22: IC10.2 R94.1 U$14.2
REF23: IC10.6 R94.2 R95.1
REF24: IC10.9 R95.2 R96.1
REF25: IC11.2 R97.2 R98.1
REF26: IC10.13 R96.2 R97.1
REF27: IC11.6 R98.2 R111.1
REF28: IC11.9 R93.1 R111.2
REF29: IC13.2 R124.1 U$18.2
REF30: IC13.6 R124.2 R125.1
REF31: IC13.9 R125.2 R126.1
REF32: IC14.2 R127.2 R128.1
REF33: IC13.13 R126.2 R127.1
REF34: IC14.6 R128.2 R141.1
REF35: IC14.9 R123.1 R141.2
REF36: IC16.2 R154.1 U$22.2
REF37: IC16.6 R154.2 R155.1
REF38: IC16.9 R155.2 R156.1
REF39: IC17.2 R157.2 R158.1
REF40: IC16.13 R156.2 R157.1
REF41: IC17.6 R158.2 R171.1
REF42: IC17.9 R153.1 R171.2
VCC: ENABLE_VU.1 IC1.4 IC2.4 J1.VBUS SELECTPOWER.1 U$2.3 X2.4
VCC1: ENABLE_VU1.1 IC4.4 IC5.4 J2.VBUS SELECTPOWER1.1 U$6.3 X4.4
VCC2: ENABLE_VU2.1 IC7.4 IC8.4 J3.VBUS SELECTPOWER2.1 U$10.3 X6.4
VCC3: ENABLE_VU3.1 IC10.4 IC11.4 J4.VBUS SELECTPOWER3.1 U$14.3 X8.4
VCC4: ENABLE_VU4.1 IC13.4 IC14.4 J5.VBUS SELECTPOWER4.1 U$18.3 X10.4
VCC5: ENABLE_VU5.1 IC16.4 IC17.4 J6.VBUS SELECTPOWER5.1 U$22.3 X12.4

## Tracks (layer width: path | path; a pad name or v marks a point on that pad's centre or on a via)
AUDIO  (via drill 0.6)
  Top 0.61: v41,216.99 v38,216.99 | v42.02,195.16 v42,198.99 | v51.02,211.44 v51,205.15
  Bottom 0.305: 51.74,199.41 51.68,199.41 51.08,199 47.32,199 47.07,199.06
  Bottom 0.406: 42.77,200.22 44,198.99 47,198.99 | 51.67,202.24 51.67,199.48 51.74,199.41 | IC1.3 42.77,193.22 42,193.99 42,195.14 v42.02,195.16
  Bottom 0.61: 42.77,200.22 IC1.12 42.77,199.76 v42,198.99 | 47,198.99 47.07,199.06 48,199.99 48,200.56 IC1.10 | IC1.5 47.85,194.14 47,194.99 42,194.99 v42.02,195.16 | IC2.10 50.05,220.12 R20.1 50,218.87 50,216.99 48.22,215.21 IC2.5 | IC2.5 48.22,214.77 47,215.99 46.99,215.99 46.83,216.15 44.16,216.15 | 44.16,216.15 44,215.99 44,215.97 43.38,215.35 43.38,214.56 IC2.3 | 44.16,216.15 41.84,216.15 v41,216.99 | v38,216.99 38,221.89 IC2.14 | IC2.5 48.22,212.77 v51.02,211.44 | v51,205.15 51,202.9 51.67,202.24
AUDIO1  (via drill 0.6)
  Top 0.61: v126.09,216.99 v123.09,216.99 | v127.11,195.16 v127.09,198.99 | v136.11,211.44 v136.09,205.15
  Bottom 0.305: 136.83,199.41 136.77,199.41 136.17,199 132.41,199 132.16,199.06
  Bottom 0.406: 127.86,200.22 129.09,198.99 132.09,198.99 | 136.76,202.24 136.76,199.48 136.83,199.41 | IC4.3 127.86,193.22 127.09,193.99 127.09,195.14 v127.11,195.16
  Bottom 0.61: 127.86,200.22 IC4.12 127.86,199.76 v127.09,198.99 | 132.09,198.99 132.16,199.06 133.09,199.99 133.09,200.56 IC4.10 | IC4.5 132.94,194.14 132.09,194.99 127.09,194.99 v127.11,195.16 | IC5.10 135.14,220.12 R39.1 135.09,218.87 135.09,216.99 133.31,215.21 IC5.5 | IC5.5 133.31,214.77 132.09,215.99 132.08,215.99 131.92,216.15 129.25,216.15 | 129.25,216.15 129.09,215.99 129.09,215.97 128.47,215.35 128.47,214.56 IC5.3 | 129.25,216.15 126.93,216.15 v126.09,216.99 | v123.09,216.99 123.09,221.89 IC5.14 | IC5.5 133.31,212.77 v136.11,211.44 | v136.09,205.15 136.09,202.9 136.76,202.24
AUDIO2  (via drill 0.6)
  Top 0.61: v41,129.36 v38,129.36 | v42.02,107.53 v42,111.36 | v51.02,123.81 v51,117.52
  Bottom 0.305: 51.74,111.78 51.68,111.78 51.08,111.37 47.32,111.37 47.07,111.43
  Bottom 0.406: 42.77,112.59 44,111.36 47,111.36 | 51.67,114.61 51.67,111.85 51.74,111.78 | IC7.3 42.77,105.59 42,106.36 42,107.51 v42.02,107.53
  Bottom 0.61: 42.77,112.59 IC7.12 42.77,112.13 v42,111.36 | 47,111.36 47.07,111.43 48,112.36 48,112.93 IC7.10 | IC7.5 47.85,106.51 47,107.36 42,107.36 v42.02,107.53 | IC8.10 50.05,132.49 R69.1 50,131.24 50,129.36 48.22,127.58 IC8.5 | IC8.5 48.22,127.14 47,128.36 46.99,128.36 46.83,128.52 44.16,128.52 | 44.16,128.52 44,128.36 44,128.34 43.38,127.72 43.38,126.94 IC8.3 | 44.16,128.52 41.84,128.52 v41,129.36 | v38,129.36 38,134.26 IC8.14 | IC8.5 48.22,125.14 v51.02,123.81 | v51,117.52 51,115.27 51.67,114.61
AUDIO3  (via drill 0.6)
  Top 0.61: v126.09,129.36 v123.09,129.36 | v127.11,107.53 v127.09,111.36 | v136.11,123.81 v136.09,117.52
  Bottom 0.305: 136.83,111.78 136.77,111.78 136.17,111.37 132.41,111.37 132.16,111.43
  Bottom 0.406: 127.86,112.59 129.09,111.36 132.09,111.36 | 136.76,114.61 136.76,111.85 136.83,111.78 | IC10.3 127.86,105.59 127.09,106.36 127.09,107.51 v127.11,107.53
  Bottom 0.61: 127.86,112.59 IC10.12 127.86,112.13 v127.09,111.36 | 132.09,111.36 132.16,111.43 133.09,112.36 133.09,112.93 IC10.10 | IC10.5 132.94,106.51 132.09,107.36 127.09,107.36 v127.11,107.53 | IC11.10 135.14,132.49 R99.1 135.09,131.24 135.09,129.36 133.31,127.58 IC11.5 | IC11.5 133.31,127.14 132.09,128.36 132.08,128.36 131.92,128.52 129.25,128.52 | 129.25,128.52 129.09,128.36 129.09,128.34 128.47,127.72 128.47,126.94 IC11.3 | 129.25,128.52 126.93,128.52 v126.09,129.36 | v123.09,129.36 123.09,134.26 IC11.14 | IC11.5 133.31,125.14 v136.11,123.81 | v136.09,117.52 136.09,115.27 136.76,114.61
AUDIO4  (via drill 0.6)
  Top 0.61: v41,43 v38,43 | v42.02,21.17 v42,25 | v51.02,37.45 v51,31.16
  Bottom 0.305: 51.74,25.42 51.68,25.42 51.08,25.01 47.32,25.01 47.07,25.07
  Bottom 0.406: 42.77,26.23 44,25 47,25 | 51.67,28.25 51.67,25.49 51.74,25.42 | IC13.3 42.77,19.23 42,20 42,21.15 v42.02,21.17
  Bottom 0.61: 42.77,26.23 IC13.12 42.77,25.77 v42,25 | 47,25 47.07,25.07 48,26 48,26.57 IC13.10 | IC13.5 47.85,20.15 47,21 42,21 v42.02,21.17 | IC14.10 50.05,46.13 R129.1 50,44.88 50,43 48.22,41.22 IC14.5 | IC14.5 48.22,40.78 47,42 46.99,42 46.83,42.16 44.16,42.16 | 44.16,42.16 44,42 44,41.98 43.38,41.36 43.38,40.57 IC14.3 | 44.16,42.16 41.84,42.16 v41,43 | v38,43 38,47.9 IC14.14 | IC14.5 48.22,38.78 v51.02,37.45 | v51,31.16 51,28.91 51.67,28.25
AUDIO5  (via drill 0.6)
  Top 0.61: v124.82,43 v121.82,43 | v125.84,21.17 v125.82,25 | v134.84,37.45 v134.82,31.16
  Bottom 0.305: 135.56,25.42 135.5,25.42 134.9,25.01 131.14,25.01 130.89,25.07
  Bottom 0.406: 126.59,26.23 127.82,25 130.82,25 | 135.49,28.25 135.49,25.49 135.56,25.42 | IC16.3 126.59,19.23 125.82,20 125.82,21.15 v125.84,21.17
  Bottom 0.61: 126.59,26.23 IC16.12 126.59,25.77 v125.82,25 | 130.82,25 130.89,25.07 131.82,26 131.82,26.57 IC16.10 | IC16.5 131.67,20.15 130.82,21 125.82,21 v125.84,21.17 | IC17.10 133.87,46.13 R159.1 133.82,44.88 133.82,43 132.04,41.22 IC17.5 | IC17.5 132.04,40.78 130.82,42 130.81,42 130.65,42.16 127.98,42.16 | 127.98,42.16 127.82,42 127.82,41.98 127.19,41.36 127.19,40.57 IC17.3 | 127.98,42.16 125.66,42.16 v124.82,43 | v121.82,43 121.82,47.9 IC17.14 | IC17.5 132.04,38.78 v134.84,37.45 | v134.82,31.16 134.82,28.91 135.49,28.25
GND  (via drill 0.6)  (2 unrouted)
  Top 0.406: v48.3,208.48 v48.3,205.04
  Top 0.61: v42,184.99 v38,184.99 | v44.34,201.65 v44.34,203.98 | v18,229.99 v18,233.99 | v52,181.99 v56,181.99 | v56,187.99 v56,184.99 | v42.96,227.5 v42.98,230.09 | v61.63,223.3 61.63,221.86 v61.02,220.6 | v60.98,205.58 v60.98,208.33 | v26.68,236.48 29.51,236.48 v30.05,236.43 | v62,197.78 v61.99,200.66 | v61.3,192.51 v61.27,189.93
  Bottom 0.406: 7,221.99 7,224.99 | 56.32,210.66 56.28,210.62 56.28,209.92 55.23,209.18 55.23,208.61 54.53,208.06 53.3,207.85 53.04,207.87 52.89,207.87 52.85,207.84 52.73,207.85 49.4,207.88 49.37,208.09 49.35,208.09 49.16,208.28 v48.3,208.48 48.2,208.41 46.58,208.41 | v48.3,205.04 46.74,204.99 R7.2 44.37,205.19 R8.2
  Bottom 0.6: J1.GND 4.68,244.67 4,243.99
  Bottom 0.61: v42,184.99 45,184.99 46.22,186.21 R6.2 52.35,181.99 v52,181.99 | v38,184.99 37,184.99 | IC1.11 v44.34,201.65 | v44.34,203.98 R8.2 | R21.1 45.68,220.63 IC2.11 | R34.2 21.06,227.93 19,229.99 v18,229.99 | v18,233.99 20.34,233.99 VIRTUAL_GND.3 20.45,235.44 21,235.99 20,235.99 20,236.12 20.19,236.31 26.52,236.31 v26.68,236.48 | T1.E 56.49,181.5 v56,181.99 v56,184.99 | v56,187.99 57.91,187.99 T2.E 59.17,188.99 61,188.99 61.27,189.09 v61.27,189.93 | IC3.4 5.07,218.92 5,218.99 5,219.99 7,221.99 | 7,224.99 6,225.99 | R32.2-1 3.98,182.01 6,179.99 6,174.54 6.01,174.53 6.01,174.24 | 6.01,174.24 39.36,174.24 39.84,174.72 39.84,177.27 BATTERY.2 | 21.11,174.72 21.03,174.64 6.29,174.64 6.29,174.52 6.01,174.24 | 36.89,174.75 39.7,174.75 | 6.11,174.76 1.08,174.76 1.04,174.79 1.04,174.25 6.14,174.25 6.16,174.27 | R11.2 45.12,225.87 v42.96,227.5 | v42.98,230.09 42,229.99 40,231.99 R13.2 37.56,232.62 35.59,232.62 34.68,233.54 U$1.3 30,233.78 v30.05,236.43 | v61.63,223.3 61.64,223.07 61.64,225.04 59.47,227.22 T7.E 58.77,227.22 57.38,228.9 57.38,232.9 58,233.99 58,237.23 X2.1 | v61.02,220.6 61.02,219.6 59.43,219.99 T6.E 59.39,219.6 61,217.99 61,215.99 60.72,215.99 60.55,215.82 57.21,215.82 56.53,215.13 56.53,214.52 56,213.99 | v60.98,205.58 59.37,204.36 T4.E 59.14,204.26 60.73,204.26 61.47,203.52 61.47,201.81 62,201.27 v61.99,200.66 | v60.98,208.33 61,210.99 60.03,210.99 T5.E | v62,197.78 60.75,196.74 T3.E 59.25,196.74 61,194.99 61,192.94 61.35,192.59 61.35,192.07 v61.3,192.51 | R10.2 46.58,208.41 | 49.6,228.05 49.6,230.17 49.24,230.53 44.39,230.53
  pour Bottom (isolate 0.813): 0,173.99 71,173.99 71,248.99 0,248.99
GND1  (via drill 0.6)  (2 unrouted)
  Top 0.406: v133.39,208.48 v133.39,205.04
  Top 0.61: v127.09,184.99 v123.09,184.99 | v129.43,201.65 v129.43,203.98 | v103.09,229.99 v103.09,233.99 | v137.09,181.99 v141.09,181.99 | v141.09,187.99 v141.09,184.99 | v128.05,227.5 v128.07,230.09 | v146.72,223.3 146.72,221.86 v146.11,220.6 | v146.07,205.58 v146.07,208.33 | v111.77,236.48 114.6,236.48 v115.14,236.43 | v147.09,197.78 v147.08,200.66 | v146.39,192.51 v146.36,189.93
  Bottom 0.406: 92.09,221.99 92.09,224.99 | 141.41,210.66 141.37,210.62 141.37,209.92 140.32,209.18 140.32,208.61 139.62,208.06 138.39,207.85 138.13,207.87 137.98,207.87 137.94,207.84 137.82,207.85 134.49,207.88 134.46,208.09 134.44,208.09 134.25,208.28 v133.39,208.48 133.29,208.41 131.67,208.41 | v133.39,205.04 131.83,204.99 R58.2 129.46,205.19 R59.2
  Bottom 0.6: J2.GND 89.77,244.67 89.09,243.99
  Bottom 0.61: v127.09,184.99 130.09,184.99 131.31,186.21 R57.2 137.44,181.99 v137.09,181.99 | v123.09,184.99 122.09,184.99 | IC4.11 v129.43,201.65 | v129.43,203.98 R59.2 | R40.1 130.77,220.63 IC5.11 | R54.2 106.15,227.93 104.09,229.99 v103.09,229.99 | v103.09,233.99 105.43,233.99 VIRTUAL_GND1.3 105.54,235.44 106.09,235.99 105.09,235.99 105.09,236.12 105.28,236.31 111.61,236.31 v111.77,236.48 | T8.E 141.58,181.5 v141.09,181.99 v141.09,184.99 | v141.09,187.99 143,187.99 T9.E 144.26,188.99 146.09,188.99 146.36,189.09 v146.36,189.93 | IC6.4 90.16,218.92 90.09,218.99 90.09,219.99 92.09,221.99 | 92.09,224.99 91.09,225.99 | R52.2-1 89.07,182.01 91.09,179.99 91.09,174.54 91.1,174.53 91.1,174.24 | 91.1,174.24 124.45,174.24 124.93,174.72 124.93,177.27 BATTERY1.2 | 106.2,174.72 106.12,174.64 91.38,174.64 91.38,174.52 91.1,174.24 | 121.97,174.75 124.79,174.75 | 91.2,174.76 86.17,174.76 86.13,174.79 86.13,174.25 91.23,174.25 91.25,174.27 | R2.2 130.21,225.87 v128.05,227.5 | v128.07,230.09 127.09,229.99 125.09,231.99 R12.2 122.65,232.62 120.68,232.62 119.77,233.54 U$5.3 115.09,233.78 v115.14,236.43 | v146.72,223.3 146.73,223.07 146.73,225.04 144.56,227.22 T14.E 143.86,227.22 142.47,228.9 142.47,232.9 143.09,233.99 143.09,237.23 X4.1 | v146.11,220.6 146.11,219.6 144.52,219.99 T13.E 144.48,219.6 146.09,217.99 146.09,215.99 145.81,215.99 145.64,215.82 142.3,215.82 141.62,215.13 141.62,214.52 141.09,213.99 | v146.07,205.58 144.46,204.36 T11.E 144.23,204.26 145.82,204.26 146.56,203.52 146.56,201.81 147.09,201.27 v147.08,200.66 | v146.07,208.33 146.09,210.99 145.12,210.99 T12.E
  Bottom 0.61: v147.09,197.78 145.84,196.74 T10.E 144.34,196.74 146.09,194.99 146.09,192.94 146.44,192.59 146.44,192.07 v146.39,192.51 | R1.2 131.67,208.41 | 134.69,228.05 134.69,230.17 134.33,230.53 129.48,230.53
  pour Bottom (isolate 0.813): 85.09,173.99 156.09,173.99 156.09,248.99 85.09,248.99
GND2  (via drill 0.6)  (2 unrouted)
  Top 0.406: v48.3,120.85 v48.3,117.41
  Top 0.61: v42,97.36 v38,97.36 | v44.34,114.02 v44.34,116.35 | v18,142.36 v18,146.36 | v52,94.36 v56,94.36 | v56,100.36 v56,97.36 | v42.96,139.87 v42.98,142.46 | v61.63,135.67 61.63,134.23 v61.02,132.97 | v60.98,117.95 v60.98,120.7 | v26.68,148.85 29.51,148.85 v30.05,148.79 | v62,110.15 v61.99,113.03 | v61.3,104.88 v61.27,102.3
  Bottom 0.406: 7,134.36 7,137.36 | 56.32,123.03 56.28,122.99 56.28,122.29 55.23,121.55 55.23,120.98 54.53,120.43 53.3,120.22 53.04,120.23 52.89,120.23 52.85,120.21 52.73,120.22 49.4,120.25 49.37,120.46 49.35,120.46 49.16,120.65 v48.3,120.85 48.2,120.78 46.58,120.78 | v48.3,117.41 46.74,117.36 R88.2 44.37,117.56 R89.2
  Bottom 0.6: J3.GND 4.68,157.04 4,156.36
  Bottom 0.61: v42,97.36 45,97.36 46.22,98.58 R87.2 52.35,94.36 v52,94.36 | v38,97.36 37,97.36 | IC7.11 v44.34,114.02 | v44.34,116.35 R89.2 | R70.1 45.68,133 IC8.11 | R84.2 21.06,140.3 19,142.36 v18,142.36 | v18,146.36 20.34,146.36 VIRTUAL_GND2.3 20.45,147.81 21,148.36 20,148.36 20,148.49 20.19,148.68 26.52,148.68 v26.68,148.85 | T15.E 56.49,93.87 v56,94.36 v56,97.36 | v56,100.36 57.91,100.36 T16.E 59.17,101.36 61,101.36 61.27,101.46 v61.27,102.3 | IC9.4 5.07,131.29 5,131.36 5,132.36 7,134.36 | 7,137.36 6,138.36 | R82.2-1 3.98,94.38 6,92.36 6,86.91 6.01,86.9 6.01,86.61 | 6.01,86.61 39.36,86.61 39.84,87.09 39.84,89.64 BATTERY2.2 | 21.11,87.08 21.03,87.01 6.29,87.01 6.29,86.89 6.01,86.61 | 36.89,87.12 39.7,87.12 | 6.11,87.13 1.08,87.13 1.04,87.16 1.04,86.62 6.14,86.62 6.16,86.64 | R62.2 45.12,138.24 v42.96,139.87 | v42.98,142.46 42,142.36 40,144.36 R63.2 37.56,144.99 35.59,144.99 34.68,145.91 U$9.3 30,146.16 v30.05,148.79 | v61.63,135.67 61.64,135.44 61.64,137.41 59.47,139.59 T21.E 58.77,139.59 57.38,141.27 57.38,145.27 58,146.36 58,149.6 X6.1 | v61.02,132.97 61.02,131.97 59.43,132.36 T20.E 59.39,131.97 61,130.36 61,128.36 60.72,128.36 60.55,128.19 57.21,128.19 56.53,127.5 56.53,126.89 56,126.36 | v60.98,117.95 59.37,116.73 T18.E 59.14,116.63 60.73,116.63 61.47,115.89 61.47,114.18 62,113.64 v61.99,113.03 | v60.98,120.7 61,123.36 60.03,123.36 T19.E | v62,110.15 60.75,109.11 T17.E 59.25,109.11 61,107.36 61,105.31 61.35,104.96 61.35,104.44 v61.3,104.88 | R61.2 46.58,120.78 | 49.6,140.42 49.6,142.54 49.24,142.9 44.39,142.9
  pour Bottom (isolate 0.813): 0,86.36 71,86.36 71,161.36 0,161.36
GND3  (via drill 0.6)  (2 unrouted)
  Top 0.406: v133.39,120.85 v133.39,117.41
  Top 0.61: v127.09,97.36 v123.09,97.36 | v129.43,114.02 v129.43,116.35 | v103.09,142.36 v103.09,146.36 | v137.09,94.36 v141.09,94.36 | v141.09,100.36 v141.09,97.36 | v128.05,139.87 v128.07,142.46 | v146.72,135.67 146.72,134.23 v146.11,132.97 | v146.07,117.95 v146.07,120.7 | v111.77,148.85 114.6,148.85 v115.14,148.79 | v147.09,110.15 v147.08,113.03 | v146.39,104.88 v146.36,102.3
  Bottom 0.406: 92.09,134.36 92.09,137.36 | 141.41,123.03 141.37,122.99 141.37,122.29 140.32,121.55 140.32,120.98 139.62,120.43 138.39,120.22 138.13,120.23 137.98,120.23 137.94,120.21 137.82,120.22 134.49,120.25 134.46,120.46 134.44,120.46 134.25,120.65 v133.39,120.85 133.29,120.78 131.67,120.78 | v133.39,117.41 131.83,117.36 R118.2 129.46,117.56 R119.2
  Bottom 0.6: J4.GND 89.77,157.04 89.09,156.36
  Bottom 0.61: v127.09,97.36 130.09,97.36 131.31,98.58 R117.2 137.44,94.36 v137.09,94.36 | v123.09,97.36 122.09,97.36 | IC10.11 v129.43,114.02 | v129.43,116.35 R119.2 | R100.1 130.77,133 IC11.11 | R114.2 106.15,140.3 104.09,142.36 v103.09,142.36 | v103.09,146.36 105.43,146.36 VIRTUAL_GND3.3 105.54,147.81 106.09,148.36 105.09,148.36 105.09,148.49 105.28,148.68 111.61,148.68 v111.77,148.85 | T22.E 141.58,93.87 v141.09,94.36 v141.09,97.36 | v141.09,100.36 143,100.36 T23.E 144.26,101.36 146.09,101.36 146.36,101.46 v146.36,102.3 | IC12.4 90.16,131.29 90.09,131.36 90.09,132.36 92.09,134.36 | 92.09,137.36 91.09,138.36 | R112.2-1 89.07,94.38 91.09,92.36 91.09,86.91 91.1,86.9 91.1,86.61 | 91.1,86.61 124.45,86.61 124.93,87.09 124.93,89.64 BATTERY3.2 | 106.2,87.08 106.12,87.01 91.38,87.01 91.38,86.89 91.1,86.61 | 121.97,87.12 124.79,87.12 | 91.2,87.13 86.17,87.13 86.13,87.16 86.13,86.62 91.23,86.62 91.25,86.64 | R92.2 130.21,138.24 v128.05,139.87 | v128.07,142.46 127.09,142.36 125.09,144.36 R93.2 122.65,144.99 120.68,144.99 119.77,145.91 U$13.3 115.09,146.16 v115.14,148.79 | v146.72,135.67 146.73,135.44 146.73,137.41 144.56,139.59 T28.E 143.86,139.59 142.47,141.27 142.47,145.27 143.09,146.36 143.09,149.6 X8.1 | v146.11,132.97 146.11,131.97 144.52,132.36 T27.E 144.48,131.97 146.09,130.36 146.09,128.36 145.81,128.36 145.64,128.19 142.3,128.19 141.62,127.5 141.62,126.89 141.09,126.36 | v146.07,117.95 144.46,116.73 T25.E 144.23,116.63 145.82,116.63 146.56,115.89 146.56,114.18 147.09,113.64 v147.08,113.03 | v146.07,120.7 146.09,123.36 145.12,123.36 T26.E | v147.09,110.15 145.84,109.11 T24.E 144.34,109.11 146.09,107.36 146.09,105.31 146.44,104.96 146.44,104.44 v146.39,104.88
  Bottom 0.61: R91.2 131.67,120.78 | 134.69,140.42 134.69,142.54 134.33,142.9 129.48,142.9
  pour Bottom (isolate 0.813): 85.09,86.36 156.09,86.36 156.09,161.36 85.09,161.36
GND4  (via drill 0.6)  (2 unrouted)
  Top 0.406: v48.3,34.49 v48.3,31.05
  Top 0.61: v42,11 v38,11 | v44.34,27.66 v44.34,29.99 | v18,56 v18,60 | v52,8 v56,8 | v56,14 v56,11 | v42.96,53.51 v42.98,56.1 | v61.63,49.31 61.63,47.87 v61.02,46.61 | v60.98,31.59 v60.98,34.34 | v26.68,62.49 29.51,62.49 v30.05,62.44 | v62,23.79 v61.99,26.67 | v61.3,18.52 v61.27,15.94
  Bottom 0.406: 7,48 7,51 | 56.32,36.66 56.28,36.63 56.28,35.93 55.23,35.19 55.23,34.62 54.53,34.07 53.3,33.86 53.04,33.88 52.89,33.88 52.85,33.85 52.73,33.86 49.4,33.89 49.37,34.1 49.35,34.1 49.16,34.29 v48.3,34.49 48.2,34.43 46.58,34.43 | v48.3,31.05 46.74,31 R148.2 44.37,31.2 R149.2
  Bottom 0.6: J5.GND 4.68,70.68 4,70
  Bottom 0.61: v42,11 45,11 46.22,12.22 R147.2 52.35,8 v52,8 | v38,11 37,11 | IC13.11 v44.34,27.66 | v44.34,29.99 R149.2 | R130.1 45.68,46.64 IC14.11 | R144.2 21.06,53.94 19,56 v18,56 | v18,60 20.34,60 VIRTUAL_GND4.3 20.45,61.45 21,62 20,62 20,62.13 20.19,62.32 26.52,62.32 v26.68,62.49 | T29.E 56.49,7.51 v56,8 v56,11 | v56,14 57.91,14 T30.E 59.17,15 61,15 61.27,15.1 v61.27,15.94 | IC15.4 5.07,44.93 5,45 5,46 7,48 | 7,51 6,52 | R142.2-1 3.98,8.02 6,6 6,0.55 6.01,0.54 6.01,0.25 | 6.01,0.25 39.36,0.25 39.84,0.73 39.84,3.28 BATTERY4.2 | 21.11,0.72 21.03,0.65 6.29,0.65 6.29,0.53 6.01,0.25 | 36.89,0.76 39.7,0.76 | 6.11,0.77 1.08,0.77 1.04,0.8 1.04,0.26 6.14,0.26 6.16,0.28 | R122.2 45.12,51.88 v42.96,53.51 | v42.98,56.1 42,56 40,58 R123.2 37.56,58.63 35.59,58.63 34.68,59.55 U$17.3 30,59.8 v30.05,62.44 | v61.63,49.31 61.64,49.08 61.64,51.05 59.47,53.23 T35.E 58.77,53.23 57.38,54.91 57.38,58.91 58,60 58,63.24 X10.1 | v61.02,46.61 61.02,45.61 59.43,46 T34.E 59.39,45.61 61,44 61,42 60.72,42 60.55,41.83 57.21,41.83 56.53,41.14 56.53,40.53 56,40 | v60.98,31.59 59.37,30.37 T32.E 59.14,30.27 60.73,30.27 61.47,29.53 61.47,27.82 62,27.28 v61.99,26.67 | v60.98,34.34 61,37 60.03,37 T33.E | v62,23.79 60.75,22.75 T31.E 59.25,22.75 61,21 61,18.95 61.35,18.6 61.35,18.08 v61.3,18.52 | R121.2 46.58,34.43 | 49.6,54.06 49.6,56.18 49.24,56.54 44.39,56.54
  pour Bottom (isolate 0.813): 0,0 71,0 71,75 0,75
GND5  (via drill 0.6)  (2 unrouted)
  Top 0.406: v132.12,34.49 v132.12,31.05
  Top 0.61: v125.82,11 v121.82,11 | v128.16,27.66 v128.16,29.99 | v101.82,56 v101.82,60 | v135.82,8 v139.82,8 | v139.82,14 v139.82,11 | v126.78,53.51 v126.8,56.1 | v145.45,49.31 145.45,47.87 v144.84,46.61 | v144.8,31.59 v144.8,34.34 | v110.5,62.49 113.33,62.49 v113.87,62.44 | v145.82,23.79 v145.81,26.67 | v145.12,18.52 v145.09,15.94
  Bottom 0.406: 90.82,48 90.82,51 | 140.14,36.66 140.1,36.63 140.1,35.93 139.05,35.19 139.05,34.62 138.34,34.07 137.12,33.86 136.86,33.88 136.71,33.88 136.67,33.85 136.55,33.86 133.22,33.89 133.19,34.1 133.17,34.1 132.98,34.29 v132.12,34.49 132.02,34.43 130.4,34.43 | v132.12,31.05 130.56,31 R178.2 128.19,31.2 R179.2
  Bottom 0.6: J6.GND 88.5,70.68 87.82,70
  Bottom 0.61: v125.82,11 128.82,11 130.04,12.22 R177.2 136.17,8 v135.82,8 | v121.82,11 120.82,11 | IC16.11 v128.16,27.66 | v128.16,29.99 R179.2 | R160.1 129.5,46.64 IC17.11 | R174.2 104.88,53.94 102.82,56 v101.82,56 | v101.82,60 104.16,60 VIRTUAL_GND5.3 104.27,61.45 104.82,62 103.82,62 103.82,62.13 104.01,62.32 110.34,62.32 v110.5,62.49 | T36.E 140.31,7.51 v139.82,8 v139.82,11 | v139.82,14 141.73,14 T37.E 142.99,15 144.82,15 145.09,15.1 v145.09,15.94 | IC18.4 88.89,44.93 88.82,45 88.82,46 90.82,48 | 90.82,51 89.82,52 | R172.2-1 87.8,8.02 89.82,6 89.82,0.55 89.83,0.54 89.83,0.25 | 89.83,0.25 123.18,0.25 123.66,0.73 123.66,3.28 BATTERY5.2 | 104.93,0.72 104.85,0.65 90.11,0.65 90.11,0.53 89.83,0.25 | 120.7,0.76 123.52,0.76 | 89.93,0.77 84.9,0.77 84.86,0.8 84.86,0.26 89.96,0.26 89.98,0.28 | R152.2 128.94,51.88 v126.78,53.51 | v126.8,56.1 125.82,56 123.82,58 R153.2 121.38,58.63 119.41,58.63 118.49,59.55 U$21.3 113.82,59.8 v113.87,62.44 | v145.45,49.31 145.46,49.08 145.46,51.05 143.28,53.23 T42.E 142.59,53.23 141.2,54.91 141.2,58.91 141.82,60 141.82,63.24 X12.1 | v144.84,46.61 144.84,45.61 143.25,46 T41.E 143.21,45.61 144.82,44 144.82,42 144.54,42 144.37,41.83 141.03,41.83 140.35,41.14 140.35,40.53 139.82,40 | v144.8,31.59 143.19,30.37 T39.E 142.96,30.27 144.55,30.27 145.29,29.53 145.29,27.82 145.82,27.28 v145.81,26.67 | v144.8,34.34 144.82,37 143.85,37 T40.E | v145.82,23.79 144.57,22.75 T38.E 143.07,22.75 144.82,21 144.82,18.95 145.17,18.6 145.17,18.08 v145.12,18.52 | R151.2 130.4,34.43 | 133.42,54.06 133.42,56.18 133.06,56.54 128.21,56.54
  pour Bottom (isolate 0.813): 83.82,0 154.82,0 154.82,75 83.82,75
GND_OP
  Bottom 0.406: 7,216.99 7,219.99 9,221.99 9,226.62 U$4.3